# Altium PCB PCB1.PcbDoc (part 2 of 2)
Units mm, origin at the board's own origin, x right, y up, seen from the top; angles counter-clockwise.
Board outline 20 x 26.04 mm, 2 copper layers (Top Layer, Bottom Layer); 21 components, 12 nets, 62 pads, 45 vias.
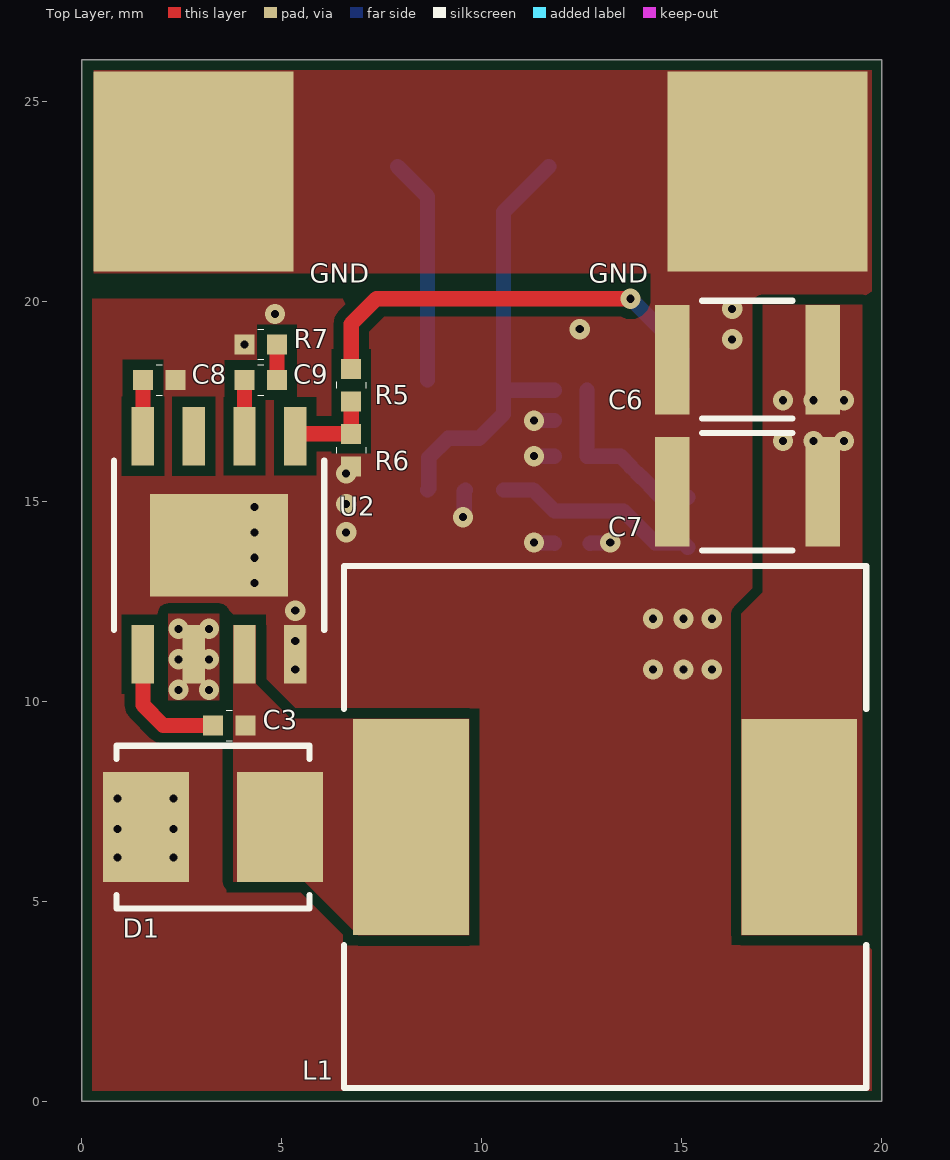
[diagram p0: Top Layer view]

## Part data (continued)
R5: "Res Thick Film 0402 33K Ohm 1% 0.125W(1/8W) ±100ppm/C Pad SMD T/R Automotive AEC-Q200", Case/Package=0402, Manufacturer="TE Connectivity", Manufacturer Lifecycle Status=ACTIVE, Max Operating Temperature=155°C, Min Operating Temperature=-55°C, Operating Supply Voltage=50V, Power Dissipation=125mW, Supplier Part Number=A130373CT-ND, Temperature Coefficient=100ppm/°C, Tolerance=1%, Category="Chip SMD Resistors", China RoHS=Non-Compliant, ComponentLink1Description=https://datasheet.octopart.com:443/CRGP0402F33K-TE-Connectivity-datasheet-179147295.pdf?src-supplier=IHS, ComponentLink1URL=https://datasheet.octopart.com:443/CRGP0402F33K-TE-Connectivity-datasheet-179147295.pdf?src-supplier=IHS, ComponentLink2Description=https://datasheet.octopart.com:443/CRGP0402F33K-TE-Connectivity-datasheet-114718804.pdf?src-supplier=element14+APAC, ComponentLink2URL=https://datasheet.octopart.com:443/CRGP0402F33K-TE-Connectivity-datasheet-114718804.pdf?src-supplier=element14+APAC, ComponentLink3Description=https://datasheet.octopart.com:443/CRGP0402F33K-TE-Connectivity-datasheet-138898427.pdf?src-supplier=Upverter, ComponentLink3URL=https://datasheet.octopart.com:443/CRGP0402F33K-TE-Connectivity-datasheet-138898427.pdf?src-supplier=Upverter, ComponentLink4Description=https://sigma.octopart.com:443/114718806/technical_drawing/TE-Connectivity-CRGP0402F33K.pdf?src-supplier=Sager+Electronics, ComponentLink4URL=https://sigma.octopart.com:443/114718806/technical_drawing/TE-Connectivity-CRGP0402F33K.pdf?src-supplier=Sager+Electronics, Composition="Thick Film", Height=350µm, Lifecycle Status=Production, Manufacturer Part Number=CRGP0402F33K, Mounting Technology="Surface Mount", Number of Terminals=2, Packaging="Cut Tape", Power Rating=125mW, Pricing="1=0.13, 10=0.061, 25=0.0468, 50=0.039, 100=0.0329, 250=0.0268, 500=0.02332, 1000=0.02056, 5000=0.01617 (USD)", REACH SVHC=Yes, RoHS=Compliant, Schedule B="8533210025, 8533210025|8533210025|8533210025|8533210025|8533210025", Stock=30242, Supplier=DigiKey, Voltage Rating=50V, Voltage Rating (DC)=50V, Width=500µm, Working Voltage=50V
R6: "Res Thick Film 0402 10K Ohm 1% 0.125W(1/8W) ±100ppm/C Pad SMD T/R Automotive AEC-Q200", Case/Package=0402, Manufacturer="TE Connectivity", Manufacturer Lifecycle Status=ACTIVE, Max Operating Temperature=155°C, Min Operating Temperature=-55°C, Operating Supply Voltage=50V, Power Dissipation=125mW, Supplier Part Number=A130367CT-ND, Temperature Coefficient=100ppm/°C, Tolerance=1%, Category="Chip SMD Resistors", China RoHS=Non-Compliant, ComponentLink1Description=https://datasheet.octopart.com:443/CRGP0402F10K-TE-Connectivity-datasheet-179147284.pdf?src-supplier=IHS, ComponentLink1URL=https://datasheet.octopart.com:443/CRGP0402F10K-TE-Connectivity-datasheet-179147284.pdf?src-supplier=IHS, ComponentLink2Description=https://datasheet.octopart.com:443/CRGP0402F10K-TE-Connectivity-datasheet-114718804.pdf?src-supplier=element14+APAC, ComponentLink2URL=https://datasheet.octopart.com:443/CRGP0402F10K-TE-Connectivity-datasheet-114718804.pdf?src-supplier=element14+APAC, ComponentLink3Description=https://datasheet.octopart.com:443/CRGP0402F10K-TE-Connectivity-datasheet-138898427.pdf?src-supplier=Upverter, ComponentLink3URL=https://datasheet.octopart.com:443/CRGP0402F10K-TE-Connectivity-datasheet-138898427.pdf?src-supplier=Upverter, ComponentLink4Description=https://sigma.octopart.com:443/114718806/technical_drawing/TE-Connectivity-CRGP0402F10K.pdf?src-supplier=Sager+Electronics, ComponentLink4URL=https://sigma.octopart.com:443/114718806/technical_drawing/TE-Connectivity-CRGP0402F10K.pdf?src-supplier=Sager+Electronics, ComponentLink5Description=https://datasheet.octopart.com:443/3-2176325-7-TE-Connectivity---AMP-datasheet-184935180.pdf?src-supplier=Master+Electronics, ComponentLink5URL=https://datasheet.octopart.com:443/3-2176325-7-TE-Connectivity---AMP-datasheet-184935180.pdf?src-supplier=Master+Electronics, Composition="Thick Film", Height=350µm, Lifecycle Status=Production, Manufacturer Part Number=CRGP0402F10K, Mounting Technology="Surface Mount", Number of Terminals=2, Packaging="Cut Tape", Power Rating=125mW, Pricing="1=0.12, 10=0.059, 25=0.0452, 50=0.0376, 100=0.0317, 250=0.0258, 500=0.0224, 1000=0.01972, 5000=0.01546 (USD)", REACH SVHC=Yes, RoHS=Compliant, Schedule B="8533210025, 8533210025|8533210025|8533210025|8533210025|8533210025", Stock=794052, Supplier=DigiKey, Voltage Rating=50V, Voltage Rating (DC)=50V, Width=500µm, Working Voltage=50V
R7: "Res Thick Film 0402 7.5K Ohm 1% 0.1W(1/10W) ±100ppm/C Pad SMD Automotive T/R", Case Code (Imperial)=0402, Case Code (Metric)=1005, Manufacturer="KOA Speer", Max Operating Temperature=155°C, Min Operating Temperature=-55°C, Power Dissipation=100mW, Power Rating=63mW, Supplier Part Number=2019-RK73H1ETTP7501FCT-ND, Temperature Coefficient=100ppm/°C, Tolerance=1%, Voltage Rating=50V, Working Voltage=75V, Case/Package=0402, Category="Chip SMD Resistors", China RoHS=Non-Compliant, ComponentLink1Description=https://datasheet.octopart.com:443/RK73H1ETTP7501F-KOA-Speer-datasheet-181956035.pdf?src-supplier=IHS, ComponentLink1URL=https://datasheet.octopart.com:443/RK73H1ETTP7501F-KOA-Speer-datasheet-181956035.pdf?src-supplier=IHS, ComponentLink2Description=https://datasheet.octopart.com:443/RK73H1ETTP7501F-KOA-Speer-datasheet-11590619.pdf?src-supplier=Upverter, ComponentLink2URL=https://datasheet.octopart.com:443/RK73H1ETTP7501F-KOA-Speer-datasheet-11590619.pdf?src-supplier=Upverter, ComponentLink3Description=https://datasheet.octopart.com:443/RK73H1ETTP7501F-KOA-Speer-datasheet-188906116.pdf?src-supplier=TME, ComponentLink3URL=https://datasheet.octopart.com:443/RK73H1ETTP7501F-KOA-Speer-datasheet-188906116.pdf?src-supplier=TME, ComponentLink4Description=https://datasheet.octopart.com:443/RK73H1ETTP7501F-KOA-Speer-datasheet-149653815.pdf?src-supplier=Newark, ComponentLink4URL=https://datasheet.octopart.com:443/RK73H1ETTP7501F-KOA-Speer-datasheet-149653815.pdf?src-supplier=Newark, ComponentLink5Description=https://datasheet.octopart.com:443/RK73H1ETTP7501F-KOA-Speer-datasheet-155997623.pdf?src-supplier=Future+Electronics, ComponentLink5URL=https://datasheet.octopart.com:443/RK73H1ETTP7501F-KOA-Speer-datasheet-155997623.pdf?src-supplier=Future+Electronics, ComponentLink6Description=https://datasheet.octopart.com:443/RK73H1ETTP7501F-KOA-Speer-datasheet-11541643.pdf?src-supplier=Arrow+Electronics, ComponentLink6URL=https://datasheet.octopart.com:443/RK73H1ETTP7501F-KOA-Speer-datasheet-11541643.pdf?src-supplier=Arrow+Electronics, ComponentLink7Description=https://datasheet.octopart.com:443/RK73H1ETTP7501F-KOA-Speer-datasheet-5377299.pdf?src-supplier=Garrett, ComponentLink7URL=https://datasheet.octopart.com:443/RK73H1ETTP7501F-KOA-Speer-datasheet-5377299.pdf?src-supplier=Garrett, ComponentLink8Description=https://datasheet.octopart.com:443/RK73H1ETTP7501F-KOA-Speer-datasheet-148194.pdf?src-supplier=Garrett, ComponentLink8URL=https://datasheet.octopart.com:443/RK73H1ETTP7501F-KOA-Speer-datasheet-148194.pdf?src-supplier=Garrett, ComponentLink9Description=https://datasheet.octopart.com:443/RK73H1ETTP7501F-KOA-Speer-datasheet-109211.pdf?src-supplier=Garrett, ComponentLink9URL=https://datasheet.octopart.com:443/RK73H1ETTP7501F-KOA-Speer-datasheet-109211.pdf?src-supplier=Garrett, ComponentLink10Description=http://sigma.octopart.com:80/rohs_statement/KOA-Speer-company-17.pdf?src-supplier=Compliance+Statements, ComponentLink10URL=http://sigma.octopart.com:80/rohs_statement/KOA-Speer-company-17.pdf?src-supplier=Compliance+Statements, Composition="Thick Film", Depth=500µm, Height=350µm, Lead Free="Lead Free", Length=1mm, Lifecycle Status=Production, Manufacturer Part Number=RK73H1ETTP7501F, Military Standard=Not, Mounting Technology="Surface Mount", Number of Terminals=2, Pricing="1=0.1, 10=0.027, 25=0.0196, 50=0.0158, 100=0.0129, 250=0.01004, 500=0.0084, 1000=0.00713, 5000=0.00544 (USD)", REACH SVHC=Yes, RoHS=Compliant, Schedule B="8533210045, 8533210045|8533210045|8533210045|8533210045|8533210045|8533210045|8533210045|8533210045|8533210045|8533210045|8533210045|8533210045|8533210045|8533210045|8533210045|8533210045|8533210045|8533210045|8533210045|8533210045|8533210045|8533210045|8533210045|85", Stock=83640, Supplier=DigiKey, Termination=SMD/SMT, Voltage Rating (DC)=50V, Width=500µm
U1: library part INA139NA250, "2.7 to 36V, 440kHz Variable gain current sense amplifier 5-SOT-23 -40 to 125", Manufacturer_Name="Texas Instruments", Copyright="Copyright (C) 2025 Ultra Librarian. All rights reserved.", Datasheet=https://www.ti.com/lit/gpn/ina139, Manufacturer_Part_Number=INA139NA/250, RefDes=RefDes, Type=TYPE
U2: "3A 28V 385KHz Step-Down Converter", Manufacturer_Name="Monolithic Power Systems", Copyright="Copyright (C) 2025 Ultra Librarian. All rights reserved.", Datasheet=https://www.monolithicpower.com/en/documentview/productdocument/index/version/2/document_type/Datasheet/lang/en/sku/MP1593, Manufacturer_Part_Number=MP1593DN-LF-Z, RefDes=RefDes, Type=Type

## Free pads (board coordinates)
  rect 5x5 smd far side: 6(17.145,23.241) 7(2.794,23.241)
  rect 5x5 smd: 8(17.145,23.241) 9(2.794,23.241)

## Via types
v1: diameter 0.508, hole 0.203, Top Layer to Bottom Layer, tented both sides, 45 vias

## Nets (pads, with @x,y where several pads share a name; then routed paths per layer and width w, separated by ;. In a path a pad name is that pad's centre, name@x,y a point inside that pad or via, vN(x,y) a via of type N, cw(c..) or ccw(c..) an arc to the next point about the centre after c; other vN are vias at no path point)
5V_OUT: C6.2 C7.2 J1.1 J1.2 L1.1 R5.1 | length 11.4
  Top Layer w0.381: R5.1 6.731,19.431 7.366,20.066 v1(13.716,20.066)
  Bottom Layer w0.381: v1(13.716,20.066) 15.015,18.767 J1.1
  other v1: 17.526,16.51 18.288,16.51 19.05,16.51 17.526,17.526 18.288,17.526 19.05,17.526
BATT_IN: pad.6 R1.1 R2.1 U1.3 U1.5 | length 11.1
  Bottom Layer w0.381: U1.3 8.671,15.319 8.671,16.096 9.151,16.576 9.928,16.576 10.536,17.184 10.536,17.78 U1.5 10.536,22.233 R1.1 ; U1.5@10.536,17.889 10.645,17.78 R2.1
BATT_OUT: C4.1 C5.2 pad.7 R1.2 U1.4 U2.2 | length 5.6
  Bottom Layer w0.381: R1.2 8.636,22.619 U1.4
  other v1: 2.413,10.287 3.175,10.287 2.413,11.049 3.175,11.049 2.413,11.811 3.175,11.811
C_Aout: C2.2 J1.4 R4.1 U1.1 | length 5.1
  Bottom Layer w0.381: U1.1 11.284,15.284 R4.1 C2.2@12.598,14.757 ; C2.2 13.538,14.757 14.328,13.967 15.028,13.967 J1.4@15.142,13.853
FB: R5.2 R6.1 U2.5 | length 2.4
  Top Layer w0.381: U2.5@5.423,16.713 U2.5 5.397,16.688 R6.1 R5.2
GND: C1.1 C2.1 C4.2 C5.1 C6.1 C7.1 C8.1 D1.2 J1.5 J1.6 J1.7 J1.8 pad.8 pad.9 R3.2 R4.2 R6.2 R7.1 U1.2 U2.4 U2.EPAD | length 2.8
  Bottom Layer w0.381: v1(9.525,14.605) 9.556,14.636 9.556,15.254 U1.2 ; v1(11.303,13.97) 11.316,13.957 11.798,13.957 R4.2 ; v1(11.303,16.129) C1.1 ; v1(11.303,17.018) R3.2 ; C2.1 12.713,13.957 13.195,13.957 v1(13.208,13.97)
  other v1: 0.889,6.096 2.286,6.096 0.889,6.807 2.286,6.807 0.889,7.569 2.286,7.569 5.334,10.795 14.275,10.795 15.037,10.795 15.748,10.795 5.334,11.506 14.275,12.065 15.037,12.065 15.748,12.065 5.334,12.268 4.318,12.954 4.318,13.589 4.318,14.224 6.604,14.224 4.318,14.859 6.604,14.935 6.604,15.697 4.064,18.923 16.256,19.05 12.446,19.304 4.826,19.685 16.256,19.812
NetC3_1: C3.1 U2.1 | length 3.2
  Top Layer w0.381: U2.1 1.524,9.906 2.032,9.398 C3.1
NetC9_1: C9.1 R7.2 | length 0.9
  Top Layer w0.381: C9.1 R7.2
NetC9_2: C9.2 U2.6 | length 1.4
  Top Layer w0.381: U2.6 C9.2
SS: C8.2 U2.8 | length 1.4
  Top Layer w0.381: U2.8 C8.2
SW: C3.2 D1.1 L1.2 U2.3
V_Aout: C1.2 J1.3 R2.2 R3.1 | length 4.6
  Bottom Layer w0.381: R2.2 R3.1 C1.2 13.462,16.129 13.72,15.871 13.72,15.864 13.98,15.604 13.987,15.604 14.355,15.236 14.355,15.217 14.469,15.103 J1.3@15.142,15.103
pads on no net: U2.7

## Polygon pours and split planes (outlines as drawn)
GND on Top Layer "GND_L01_P008" (solid, remove dead copper, pour order 8): 14.224,20.066 14.224,20.701 0.294,20.701 0.294,25.781 19.812,25.781 19.812,20.066 19.812,0 0,0 0,20.066
BATT_OUT on Top Layer "BATT_OUT_L01_P007" (solid, pour order 7): 2.159,10.033 2.159,12.192 3.429,12.192 3.429,10.033
5V_OUT on Top Layer "5V_OUT_L01_P005" (solid, pour order 5): 16.485,12.192 17.018,12.725 17.018,19.914 19.507,19.914 19.507,4.153 16.485,4.153
SW on Top Layer "SW_L01_P000" (solid, pour order 0): 3.785,11.906 3.785,10.446 3.785,5.486 5.575,5.486 6.909,4.153 9.677,4.153 9.677,9.563 5.226,9.563 4.343,10.446 4.343,11.906
BATT_IN on Bottom Layer "BATT_IN_L02_P009" (solid, pour order 9): 10.109,25.741 14.645,25.741 19.645,25.741 19.645,20.741 14.645,20.741 10.109,20.741
GND on Bottom Layer "GND_L02_P010" (solid, remove dead copper, pour order 10): 0,0 0,26.035 20.066,26.035 20.066,0
BATT_OUT on Bottom Layer "BATT_OUT_L02_P003" (solid, pour order 3): 5.294,25.741 5.334,25.701 9.449,25.701 9.449,20.67 5.223,20.67 4.033,20.67 3.556,20.193 3.556,10.033 1.27,10.033 1.27,20.193 0.722,20.741 0.294,20.741 0.294,25.701 0.254,25.741
5V_OUT on Bottom Layer "5V_OUT_L02_P006" (solid, pour order 6): 14.173,18.034 14.173,16.002 19.431,16.002 19.431,18.034

## Silkscreen, mask and mechanical layers (free items; w line width, h text height)
Top Overlay:
  text "GND" at 5.69,20.304 h0.81
  text "GND" at 12.675,20.304 h0.81
Bottom Overlay:
  text "+IN" at 13.691,22.581 h0.81 r270
  text "+OUT" at 3.327,19.796 h0.81
  text "5V" at 13.97,17.907 h0.81 r90
  text "V" at 13.868,15.342 h0.81 r90
  text "I" at 13.97,14.148 h0.81 r90
  text "GND" at 13.97,12.903 h0.81 r90
  text "BEC Module | Rev 1.0 | 2025-10" at 15.646,2.795 h0.81
Top Solder:
  rectangle: 5.334,21.082 14.605,25.4
Mechanical 1:
  the board outline again, w0.254